# Altium PCB AHRS_PCB.PcbDoc
Units mm, origin at the board's own origin, x right, y up, seen from the top; angles counter-clockwise.
Board outline 152.4 x 101.6 mm, 2 copper layers (Top Layer, Bottom Layer); 33 components, 18 nets, 121 pads, 47 vias.
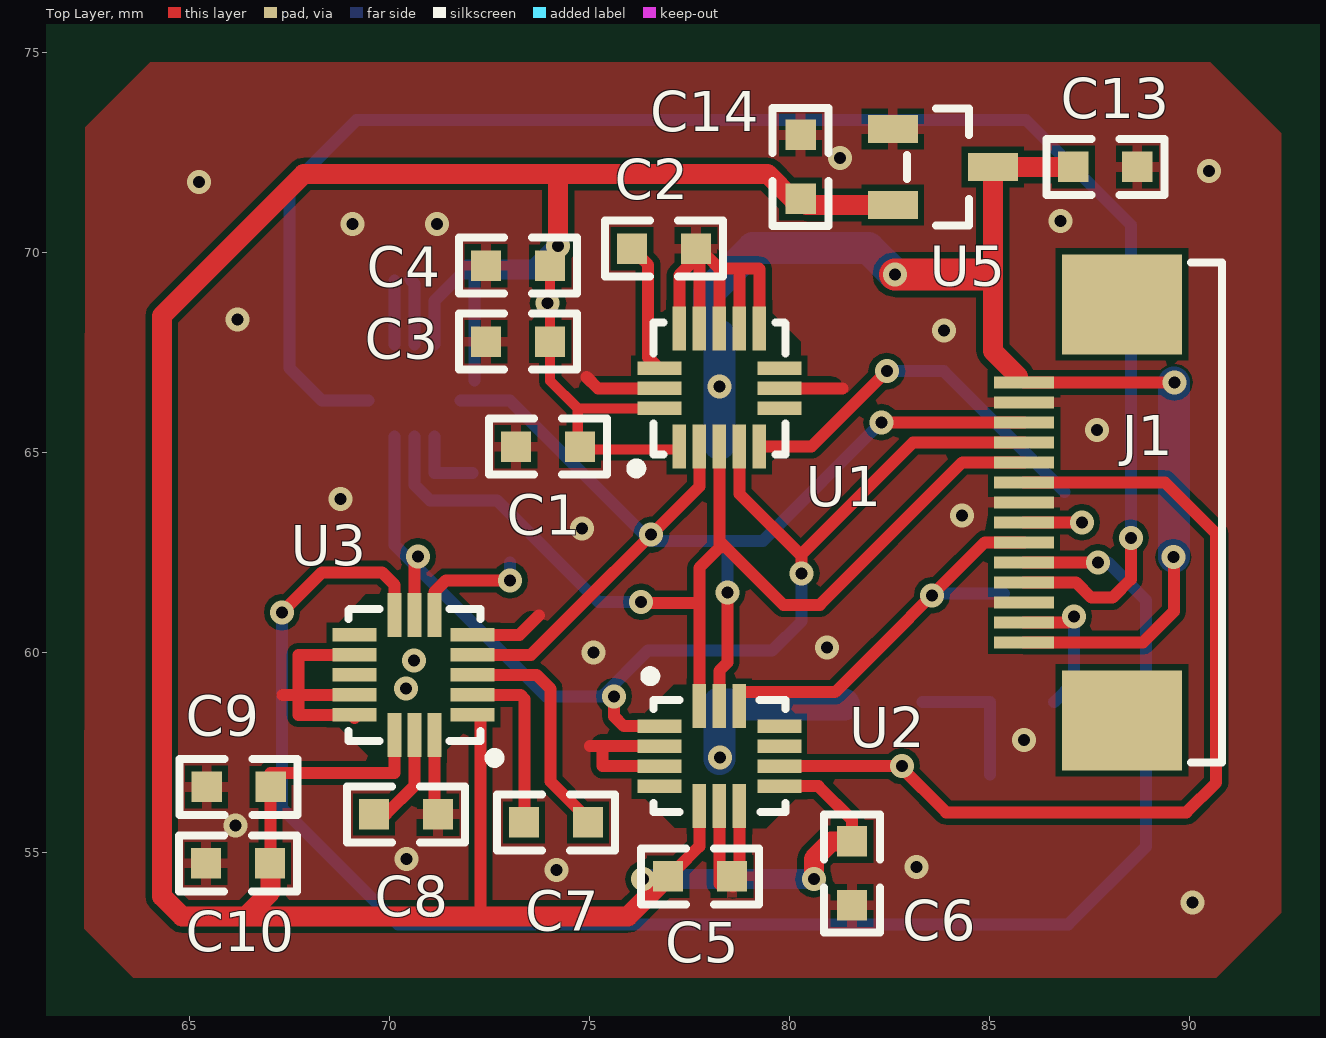
[diagram p0: Top Layer view]
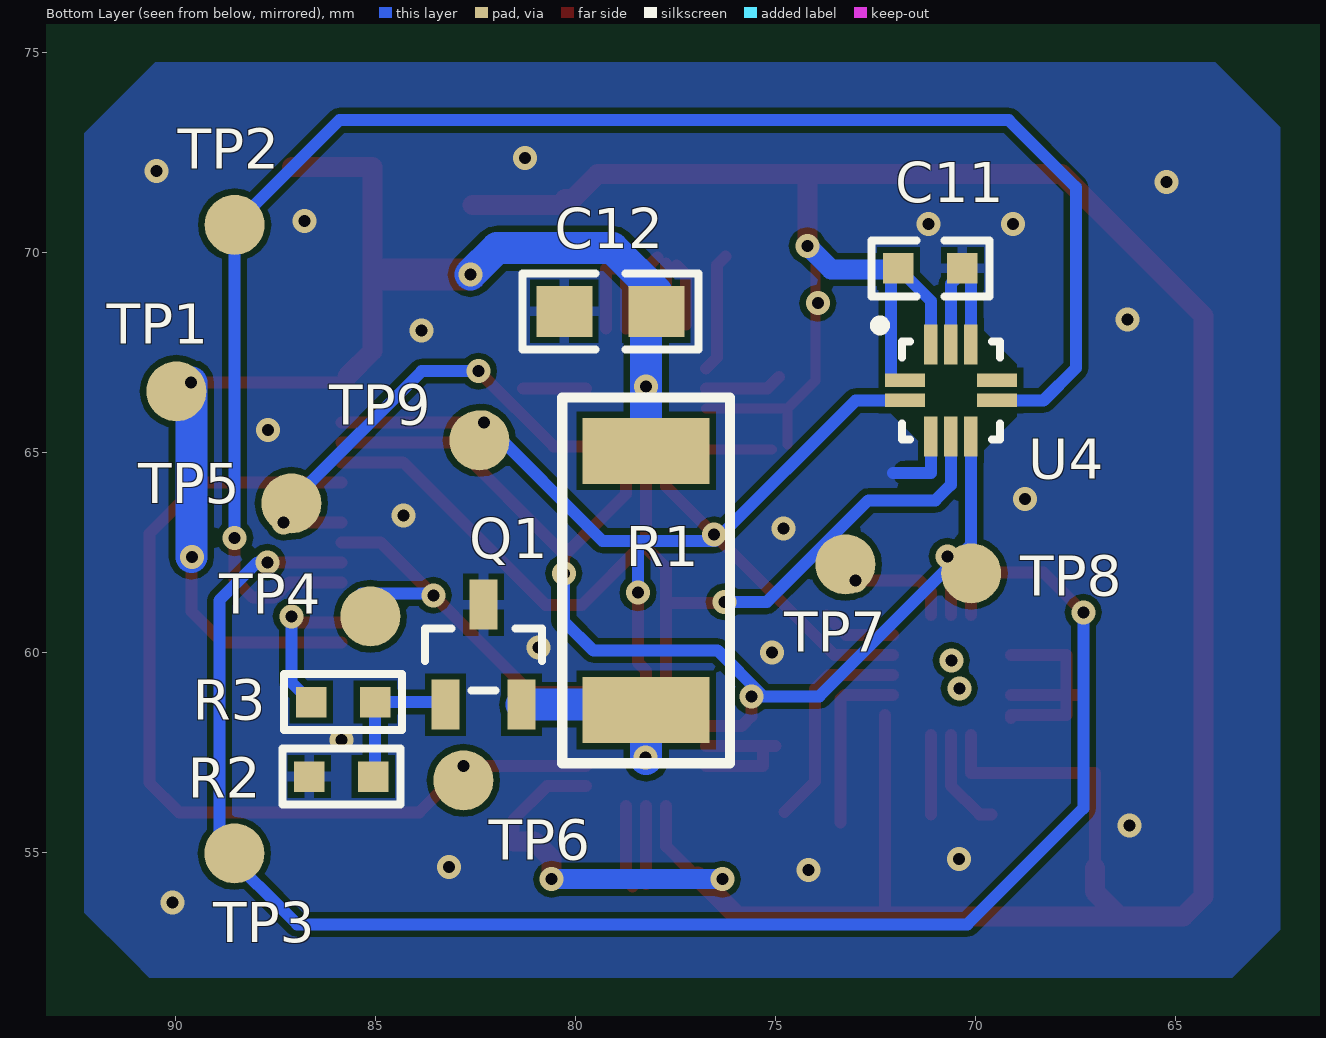
[diagram p1: Bottom Layer view, seen from below]

## Layer stack, top to bottom
Top Layer: signal copper 0.0356
Dielectric: dielectric 0.32, FR-4, Dk 4.8
Bottom Layer: signal copper 0.0356

## Board outline
25.4,25.4 177.8,25.4 177.8,127 25.4,127

## Design rules (kind name [scope] priority, off if disabled: settings)
Clearance [All] p1: gap=0.152
PolygonConnect [All] p1: connectstyle=Relief reliefconductorwidth=0.254 reliefentries=4 polygonreliefangle="90 Angle"
RoutingVias [All] p1: holewidth=0.711 width=1.27 viastyle="Through Hole" minholewidth=0.711 minwidth=1.27 maxholewidth=0.711 maxwidth=1.27
SilkscreenOverComponentPads [All] p1: minsilkscreentomaskgap=0.254
SolderMaskExpansion [All] p1: expansion=0.102
Width [All] p1: maxlimit=1 minlimit=0.254 preferedwidth=0.254
27 further rules are at their usual default settings.

## Components (designator, comment, footprint, x,y, rotation, side; value= is the part's Value field where it differs from the comment)
C1 "10nF/6.3v" C_0603 73.95,65.142 r0 top
C2 "100nF/6.3v" C_0603 76.85,70.092 r180 top
C3 "2.2uF/6.3v" C_0603 73.2,67.767 r0 top
C4 "100nF/6.3v" C_0603 73.2,69.667 r180 top
C5 "100nF/6.3v" C_0603 77.75,54.4 r180 top
C6 "100nF/6.3v" C_0603 81.55,54.475 r90 top
C7 "220nF/6.3v" C_0603 74.15,55.75 r0 top
C8 "100nF/6.3v" C_0603 70.4,55.95 r180 top
C9 "10uF/6.3v" C_0603 66.216,56.636 r180 top
C10 "100nF/6.3v" C_0603 66.2,54.725 r180 top
C11 "100nF/6.3v" C_0603 71.125,69.6 r0 bottom
C12 "22uF/6.3v" C_0805 79.125,68.525 r180 bottom
C13 "1uF/6.3v" C_0603 87.884,72.136 r180 top
C14 "1uF/6.3v" C_0603 80.264,72.136 r270 top
J1 "FPC/FFP" FPC/FFP 85.852,63.5 r180 top
Q1 "AO3420A" SOT-23 82.296,59.944 r270 bottom
R1 "11R" R_2512 78.232,61.8 r270 bottom
R2 "50k" R_0603 85.852,56.896 r180 bottom
R3 "100R" R_0603 85.804,58.756 r180 bottom
TP1 "" Test_Point 89.975,66.525 r90 bottom
TP2 "" Test_Point 88.519,70.688 r90 bottom
TP3 "" Test_Point 88.525,54.975 r90 bottom
TP4 "" Test_Point 85.125,60.9 r90 bottom
TP5 "" Test_Point 87.1,63.725 r90 bottom
TP6 "" Test_Point 82.8,56.8 r90 bottom
TP7 "" Test_Point 73.25,62.2 r90 bottom
TP8 "" Test_Point 70.104,61.976 r90 bottom
TP9 "" Test_Point 82.4,65.3 r90 bottom
U1 "ICM20602" LGA-16 78.232,66.599 r90 top
U2 "LSM6DSM" LGA-14L 78.232,57.404 r0 top
U3 "LSM303D" LGA-16 70.612,59.436 r180 top
U4 "LPS22HB" HLGA-10L 70.612,66.548 r180 bottom
U5 "XC6202" SOT-23 83.82,72.136 r180 top

## Footprints (in the part's own frame and the unit in brackets; to place one, negate y for a bottom-side part, rotate by r counter-clockwise, add the part's x,y. Pads: shape width x height; smd on the part's side, far side on the other; paste and mask are expansions set on the pad)
C_0603 [mil]
  rect 30x30 smd: 1(-31.5,0) 2(31.5,0)
  silkscreen extent -58,-28 58,28
C_0805 [mm]
  rect 1.4x1.27 smd: 1(-1.15,0) 2(1.15,0)
  silkscreen extent -2.2,-0.95 2.2,0.95
FPC/FFP [mm]
  rect 3x2.5 smd mask+0.05: 0(-2.45,5.2) 0(-2.45,-5.2)
  rect 1.5x0.3 smd mask+0.05: 1(0,3.25) 2(0,2.75) 3(0,2.25) 4(0,1.75) 5(0,1.25) 6(0,0.75) 7(0,0.25) 8(0,-0.25) 9(0,-0.75) 10(0,-1.25) 11(0,-1.75) 12(0,-2.25) 13(0,-2.75) 14(0,-3.25)
  silkscreen extent -4.95,-6.25 -4.18,6.25
HLGA-10L [mm]
  rect 1x0.34 smd mask+0.05: 1(-1.15,0.25) 2(-1.15,-0.25) 6(1.15,-0.25) 7(1.15,0.25)
  rect 0.34x1 smd mask+0.05: 3(-0.5,-1.15) 4(0,-1.15) 5(0.5,-1.15) 8(0.5,1.15) 9(0,1.15) 10(-0.5,1.15)
  silkscreen extent -1.9,-1.22 1.22,1.75
LGA-14L [mm]
  rect 1.1x0.34 smd mask+0.05: 1(-1.5,0.75) 2(-1.5,0.25) 3(-1.5,-0.25) 4(-1.5,-0.75) 8(1.5,-0.75) 9(1.5,-0.25) 10(1.5,0.25) 11(1.5,0.75)
  rect 0.34x1.1 smd mask+0.05: 5(-0.5,-1.25) 6(0,-1.25) 7(0.5,-1.25) 12(0.5,1.25) 13(0,1.25) 14(-0.5,1.25)
  silkscreen extent -1.85,-1.4 1.65,2.12
LGA-16 [mm]
  rect 1.1x0.34 smd mask+0.05: 1(-1.45,1) 2(-1.45,0.5) 3(-1.45,0) 4(-1.45,-0.5) 5(-1.45,-1) 9(1.5,-1) 10(1.5,-0.5) 11(1.5,0) 12(1.5,0.5) 13(1.5,1)
  rect 0.34x1.1 smd mask+0.05: 6(-0.5,-1.5) 7(0,-1.5) 8(0.5,-1.5) 14(0.5,1.5) 15(0,1.5) 16(-0.5,1.5)
  silkscreen extent -2.12,-1.65 1.65,2.2
R_0603 [mil]
  rect 30x30 smd: 1(-31.5,0) 2(31.5,0)
  silkscreen extent -58,-28 58,28
R_2512 [mil]
  rect 65x125 smd: 1(-127.5,0) 2(127.5,0)
  silkscreen extent -180,-83 180,83
SOT-23 [mm]
  rect 1.25x0.7 smd: 1(1.25,-0.95) 2(1.25,0.95) 3(-1.25,0)
  silkscreen extent -0.65,-1.46 0.9,1.46
Test_Point [mm]
  round 1.5 smd mask+0.05: 1(0,0)

## Part data
C1 C2 C3 C4 C5 C6 C7 C8 C9 C10 C11 C12 C13 C14: library part Capacitence, "Capacitence"
J1: "Connector"
Q1: "MOSFET"
R1 R2 R3: library part Resistence, "Resistence"
TP1 TP2 TP3 TP4 TP5 TP6 TP7 TP8 TP9: library part Testpoint
U1 U2: "IMU"
U3: "Accelerometer & Compass"
U4: "Barometer"
U5: library part XC6206P332, "LDO"

## Via types
v1: diameter 0.6, hole 0.3, Top Layer to Bottom Layer, tented both sides, 47 vias

## Nets (pads, with @x,y where several pads share a name; then routed paths per layer and width w, separated by ;. In a path a pad name is that pad's centre, name@x,y a point inside that pad or via, vN(x,y) a via of type N, cw(c..) or ccw(c..) an arc to the next point about the centre after c; other vN are vias at no path point)
3V3: C1.2 C3.2 C4.1 C5.2 C6.2 C9.1 C10.1 C11.2 C14.2 U1.1 U1.16 U2.5 U2.8 U3.1 U3.14 U4.1 U4.10 U5.2 | length 88.9
  Top Layer w0.254: C4.1 C3.2 74,66.792 74.693,66.099 ; C1.2@74.693,65.198 74.693,66.099 ; C1.2@75.082,65.075 U1.1@77.158,65.075 ; U1.16 74.693,66.099
  Top Layer w0.3: C10.1@67.016,54.604 67.016,56.984 70.112,56.984 U3.14 ; 72.263,53.409 U3.1@72.263,58.436 ; C5.2@77.165,54.585 77.732,55.151 U2.5 ; U2.8 80.709,56.654 81.55,55.813 C6.2
  Top Layer w0.5: C10.1@67.016,54.604 67.016,54.016 66.4,53.4 ; v1(74.2,70.163) 74.2,71.838 ; C5.2 75.95,53.4 66.4,53.4 ; C14.2 80.064,71.336 79.442,71.958 67.843,71.958 64.3,68.415 64.3,53.9 64.8,53.4 66.4,53.4 ; C14.2@80.414,71.186 U5.2 ; v1(80.594,54.331) 80.594,54.839 81.031,55.275 C6.2
  Bottom Layer w0.3: U4.10 71.112,68.787 C11.2 C11.2@71.954,69.571 ; U4.1@72.111,66.802 C11.2@72.111,69.414
  Bottom Layer w0.5: C11.2@71.925,69.571 71.954,69.571 73.607,69.571 v1(74.2,70.163) ; v1(76.327,54.331) v1(80.594,54.331)
  other v1: 73.939,68.732
5V: C12.2 C13.2 J1.1 J1.14 R1.1 TP1.1 U5.3 | length 31.8
  Top Layer w0.3: J1.1 88.825,60.25 89.6,61.025 v1@89.6,62.382 ; J1.14 v1(89.611,66.751)
  Top Layer w0.5: 85.701,66.901 85.07,67.532 U5.3 C13.2
  Top Layer w0.8: v1(82.626,69.444) 84.811,69.444
  Bottom Layer w0.8: C12.2 77.975,69.009 79.07,70.104 81.966,70.104 v1(82.626,69.444) ; R1.1@78.232,65.215 C12.2@78.232,67.925 ; v1@89.6,62.382 TP1.1@89.6,66.751
  other v1: 89.586,62.382 78.232,66.65
6DSM_CS: J1.6 TP4.1 U2.12 | length 10.4
  Top Layer w0.3: U2.12@78.791,59.004 81.128,59.004 84.873,62.75 J1.6
  Bottom Layer w0.3: v1@83.551,61.468 TP4.1@85.344,61.468
  other v1: 83.551,61.427
6DSM_INT: J1.9 TP6.1 U2.9 | length 23.3
  Top Layer w0.3: U2.9 82.749,57.154 83.903,56 89.909,56 90.653,56.744 90.653,62.967 89.369,64.25 J1.9
  other v1: 82.8,57.154
303D_CS: J1.5 TP3.1 U3.8 | length 42
  Top Layer w0.3: v1(67.3,61) 68.3,62 69.8,62 70.112,61.688 U3.8 ; J1.5 v1(87.7,62.25)
  Bottom Layer w0.3: v1(67.3,61) 67.3,56.1 70.2,53.2 86.957,53.2 88.9,55.143 88.9,61.3 v1@87.95,62.25
GND: C1.1 C2.1 C3.1 C4.2 C5.1 C6.1 C8.1 C9.2 C10.2 C11.1 C12.1 C13.1 C14.1 J1.3 J1.8 J1.13 Q1.3 R2.1 U1.7 U1.9 U1.10 U1.11 U1.12 U1.13 U1.15 U2.2 U2.3 U2.6 U2.7 U3.5 U3.10 U3.12 U3.13 U3.16 U4.3 U4.8 U4.9 U5.1 | length 35.4
  Top Layer w0.3: 67.31,58.936 U3.12 ; U3.13@69.112,58.362 U3.13 67.716,58.436 67.716,59.936 U3.10 ; C8.1@71.112,55.95 U3.16 ; U3.5 73.238,60.436 73.726,60.924 ; 74.914,66.884 75.198,66.599 U1.15 ; 75.003,57.654 75.311,57.654 ; U2.3 75.311,57.154 75.311,57.654 ; U2.2 75.311,57.654 ; U1.13@77.232,68.199 77.232,69.434 77.47,69.672 ; U1.12 C2.1@77.732,69.723 ; C2.1@77.953,69.875 78.232,69.596 ; C5.1@78.232,54.204 U2.6 ; U1.11 78.232,69.596 ; C5.1@78.575,54.15 78.732,54.307 U2.7 ; U1.10 78.732,69.596 ; U1.9 79.232,69.587 79.223,69.596 78.732,69.596 ; U1.7 81.311,66.599 ; 78.232,69.596 78.732,69.596
  Bottom Layer w0.3: U4.8 C11.1@70.112,69.291 ; C11.1@70.51,69.317 70.612,69.215 U4.9 ; U4.3 71.112,64.488 72.063,64.488
  other v1: 90.068,53.746 74.168,54.559 83.16,54.635 70.409,54.839 66.142,55.677 85.852,57.81 75.082,59.995 80.924,60.122 74.803,63.094 84.303,63.424 68.758,63.83 87.681,65.557 83.845,68.047 66.192,68.326 69.063,70.714 71.171,70.714 86.766,70.79 65.227,71.755 90.475,72.034 81.255,72.365
ICM_CS: J1.7 TP5.1 U1.5 | length 11.1
  Top Layer w0.3: U1.5 79.479,65.149 79.477,65.151 80.543,65.151 v1(82.423,67.031) ; J1.7 v1(87.3,63.25)
  Bottom Layer w0.3: v1(82.423,67.031) 83.845,67.031 TP5.1@86.868,64.008
LPS_CS: J1.4 TP2.1 U4.6 | length 41.5
  Top Layer w0.3: J1.4 87.15,61.75 87.534,61.366 88.062,61.366 88.519,61.824 v1(88.519,62.865)
  Bottom Layer w0.3: U4.6 68.297,66.298 67.488,67.107 67.488,71.628 69.164,73.304 85.903,73.304 TP2.1 v1(88.519,62.865)
MISO: J1.11 TP8.1 U1.4 U2.1 U3.7 U4.5 | length 29.7
  Top Layer w0.3: U3.7 v1@70.612,62.212 ; v1@75.6,58.7 75.6,58.4 75.846,58.154 U2.1 ; U1.4 78.732,63.965 80.289,62.408 v1(80.289,61.976) ; 80.34,62.509 83.081,65.25 J1.11
  Bottom Layer w0.3: U4.5 70.112,62.688 73.9,58.9 v1(75.6,58.9) ; v1@75.331,58.931 76.446,60.046 79.553,60.046 80.289,60.782 v1@80.289,61.747
  other v1: 70.7,62.4
MOSI: J1.10 TP7.1 U1.3 U2.14 U3.6 U4.4 | length 29.1
  Top Layer w0.3: U3.6 71.112,61.512 71.4,61.8 v1(73,61.8) ; v1@76.276,61.239 77.707,61.239 ; U2.14 77.732,62.111 78.321,62.7 79.832,61.189 80.747,61.189 84.308,64.75 J1.10 ; 78.232,62.611 U1.3
  Bottom Layer w0.3: U4.4 70.612,64.188 71,63.8 72.674,63.8 75.209,61.265 v1(76.276,61.265) ; TP7.1@73,61.7 v1(73,61.8) TP7.1@73,62.25
NetC2_2: C2.2 U1.14 | length 3
  Top Layer w0.3: C2.2@76.251,69.891 76.454,69.688 76.454,67.377 U1.14
NetC7_1: C7.1 U3.2 | length 4.4
  Top Layer w0.3: U3.2 73.264,58.936 73.368,58.832 C7.1@73.368,55.75
NetC7_2: C7.2 U3.3 | length 5.5
  Top Layer w0.3: U3.3 73.664,59.436 74.016,59.084 74.016,56.769 C7.2@74.778,56.007
NetC8_2: C8.2 U3.15 | length 2.6
  Top Layer w0.3: C8.2 69.895,55.95 70.612,56.667 U3.15
NetQ1_1: Q1.1 R2.2 R3.2 | length 3.5
  Bottom Layer w0.3: Q1.1@83.308,58.756 R3.2 R2.2@85.004,56.944
NetQ1_2: Q1.2 R1.2 | length 4.5
  Bottom Layer w0.8: v1@78.232,57.332 R1.2@78.232,58.737 ; R1.2@78.276,58.694 Q1.2
  other v1: 78.25,57.375
PWM: J1.2 R3.1 | length 3.7
  Top Layer w0.3: J1.2 86.95,60.75 v1(87.1,60.9)
  Bottom Layer w0.3: R3.1 87.1,59.252 v1(87.1,60.9)
SCK: J1.12 TP9.1 U1.2 U2.13 U3.4 U4.2 | length 29.4
  Top Layer w0.3: U3.4 73.525,59.936 77.732,64.143 U1.2 ; U2.13 78.232,59.538 78.435,59.741 v1(78.435,61.493) ; v1(82.285,65.75) J1.12
  Bottom Layer w0.3: U4.2 72.996,66.298 76.505,62.789 78.435,62.789 ; v1(78.435,61.493) 78.435,62.789 ; v1(82.285,65.75) 79.324,62.789 78.435,62.789
  other v1: 76.53,62.941
pads on no net: J1.0 U1.6 U1.8 U2.4 U2.10 U2.11 U3.9 U3.11 U4.7
copper on no net:
  other v1: 70.4,59.1 70.6,59.8

## Polygon pours and split planes (outlines as drawn)
GND on Bottom Layer "Mid-Layer 1-No Net" (solid): 69.545,51.867 68.986,51.867 63.576,51.867 62.382,53.061 62.382,53.619 62.382,73.127 64.008,74.752 69.24,74.752 90.5,74.752 92.227,73.025 92.278,72.974 92.278,61.951 92.278,53.492 91.084,52.299 90.653,51.867 89.941,51.867
GND on Top Layer "Mid-Layer 1-No Net" (solid): 62.382,72.949 62.382,73.127 62.484,73.228 64.008,74.752 68.097,74.752 90.5,74.752 92.177,73.076 92.278,72.974 92.278,72.669 92.278,53.492 90.653,51.867 89.103,51.867 63.576,51.867 62.357,53.086

## Other copper
Top Layer:
  pour cut-out: 77.064,68.656 76.2,67.793 76.2,65.481 77.064,64.618 79.4,64.618 80.264,65.481 80.264,67.767 79.375,68.656
  pour cut-out: 77.089,59.207 76.2,58.318 76.2,56.515 77.114,55.601 79.4,55.601 80.289,56.49 80.289,58.318 79.4,59.207
  pour cut-out: 71.73,61.468 72.593,60.604 72.593,58.725 71.272,57.404 69.444,57.404 68.58,58.268 68.58,60.604 69.393,61.468
Bottom Layer:
  pour cut-out: 69.952,68.199 68.961,67.208 68.961,65.888 69.952,64.897 71.044,64.897 72.263,66.116 72.263,67.208 71.272,68.199

## Silkscreen, mask and mechanical layers (free items; w line width, h text height)
Mechanical 1:
  circle w0.1: c89.825,50.817 r1
  circle w0.1: c64.825,50.817 r1
  circle w0.1: c89.825,75.817 r1
  circle w0.1: c64.825,75.817 r1
  lines w0.1: 62.325,50.567 ccw(c64.825,50.567) 67.325,50.567 cw(c68.575,50.567) 68.575,51.817 86.075,51.817 cw(c86.075,50.567) 87.325,50.567 ccw(c89.825,50.567) 92.325,50.567 92.325,76.067 ccw(c89.825,76.067) 87.325,76.067 cw(c86.075,76.067) 86.075,74.817 68.575,74.817 cw(c68.575,76.067) 67.325,76.067 ccw(c64.825,76.067) 62.325,76.067 62.325,50.567